# Altium PCB v2attemptBlinky(1).PcbDoc
Units mm, origin at the board's own origin, x right, y up, seen from the top; angles counter-clockwise.
Board outline 52.43 x 52.43 mm, 2 copper layers (F.Cu, B.Cu); 6 components, 4 nets, 14 pads, 0 vias.
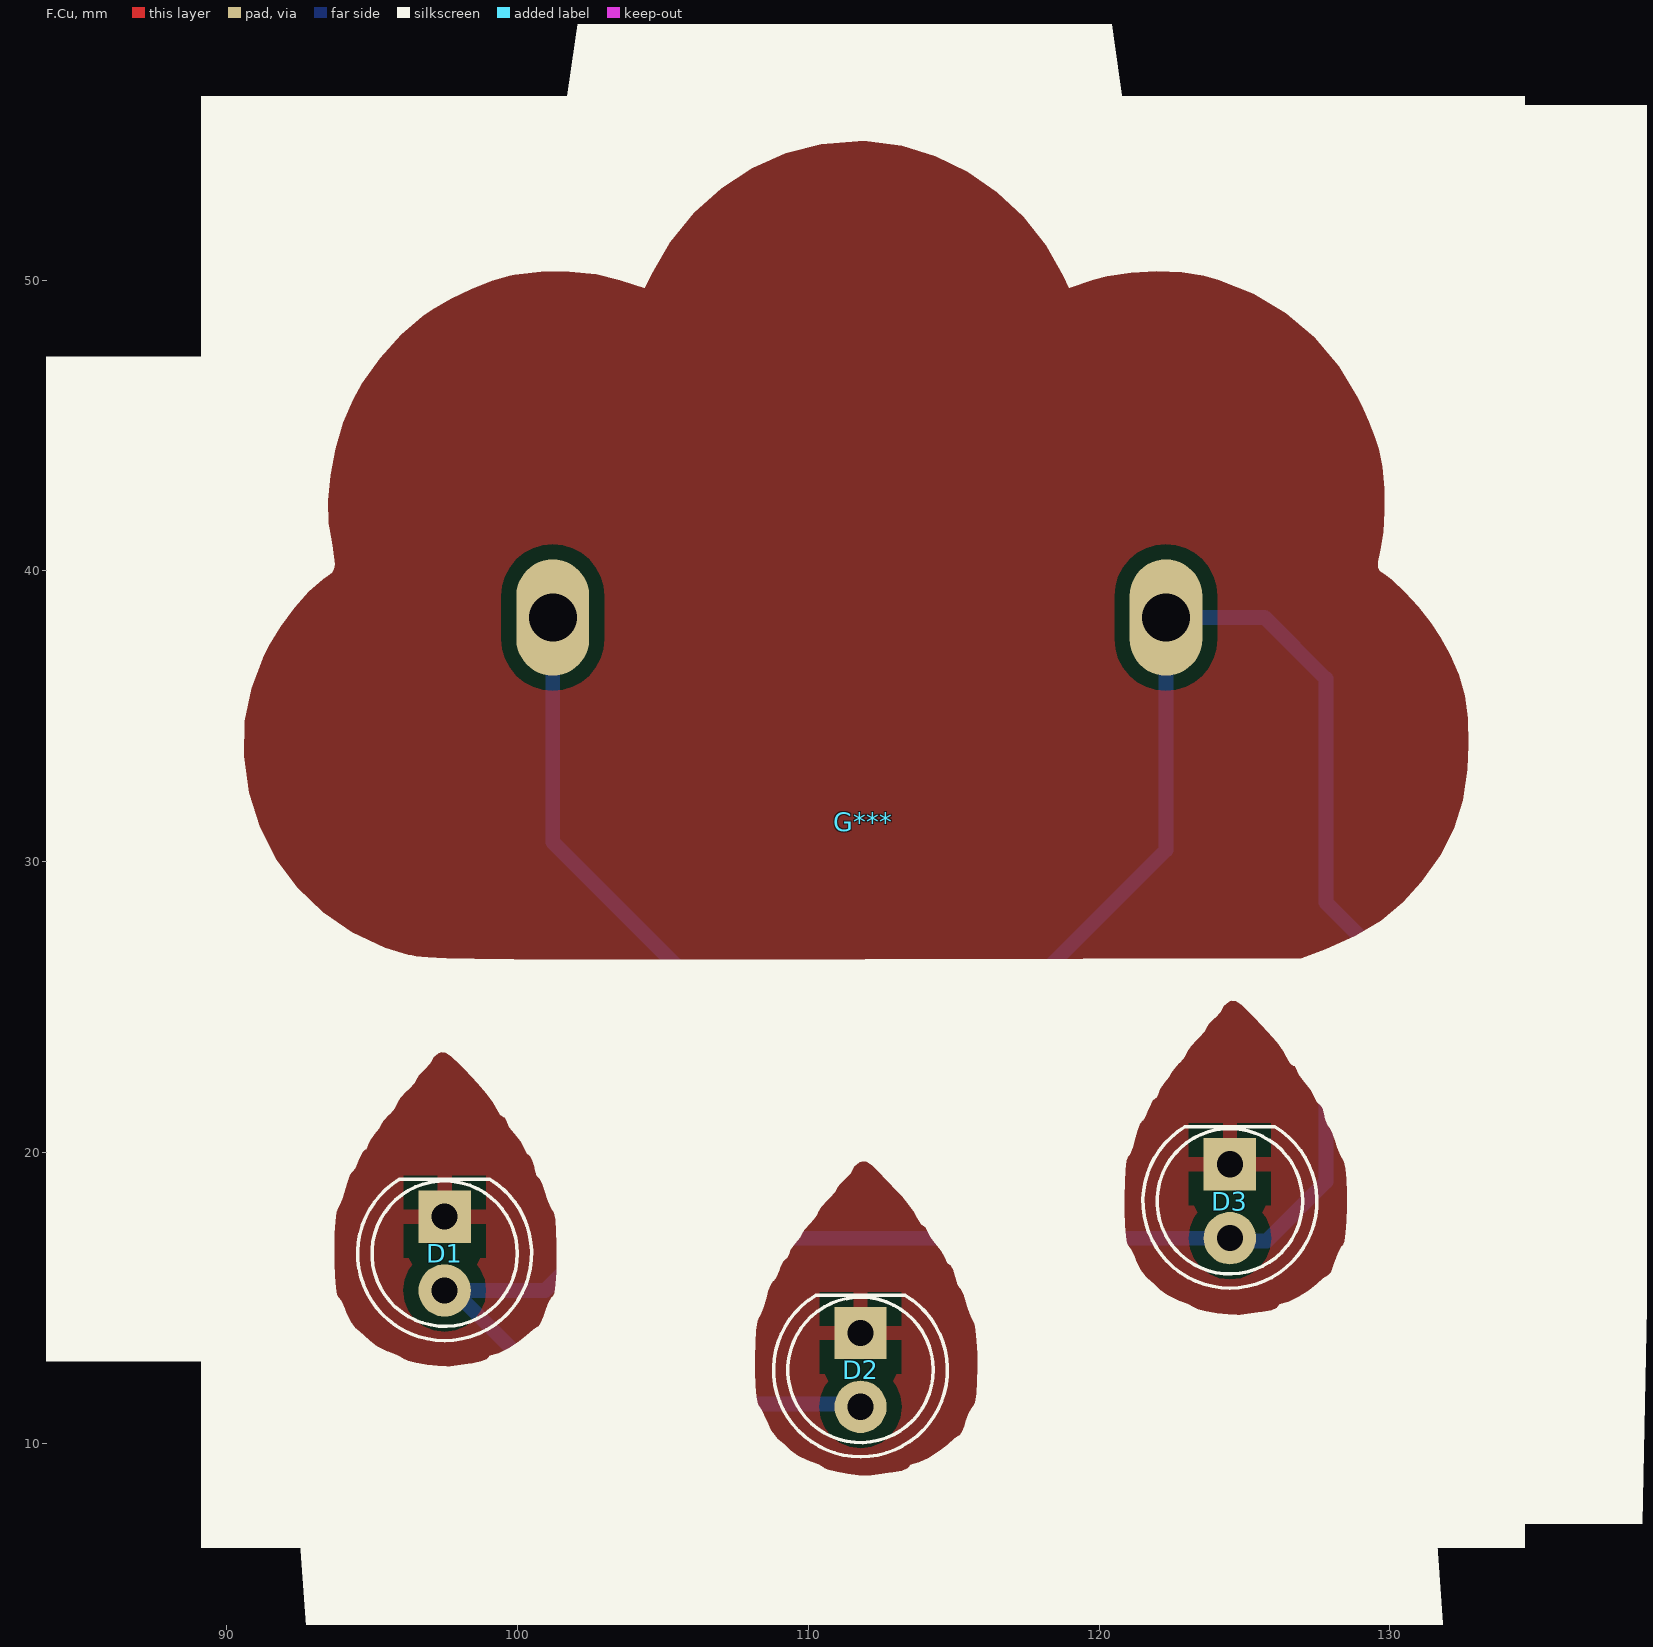
[diagram p0: F.Cu view]
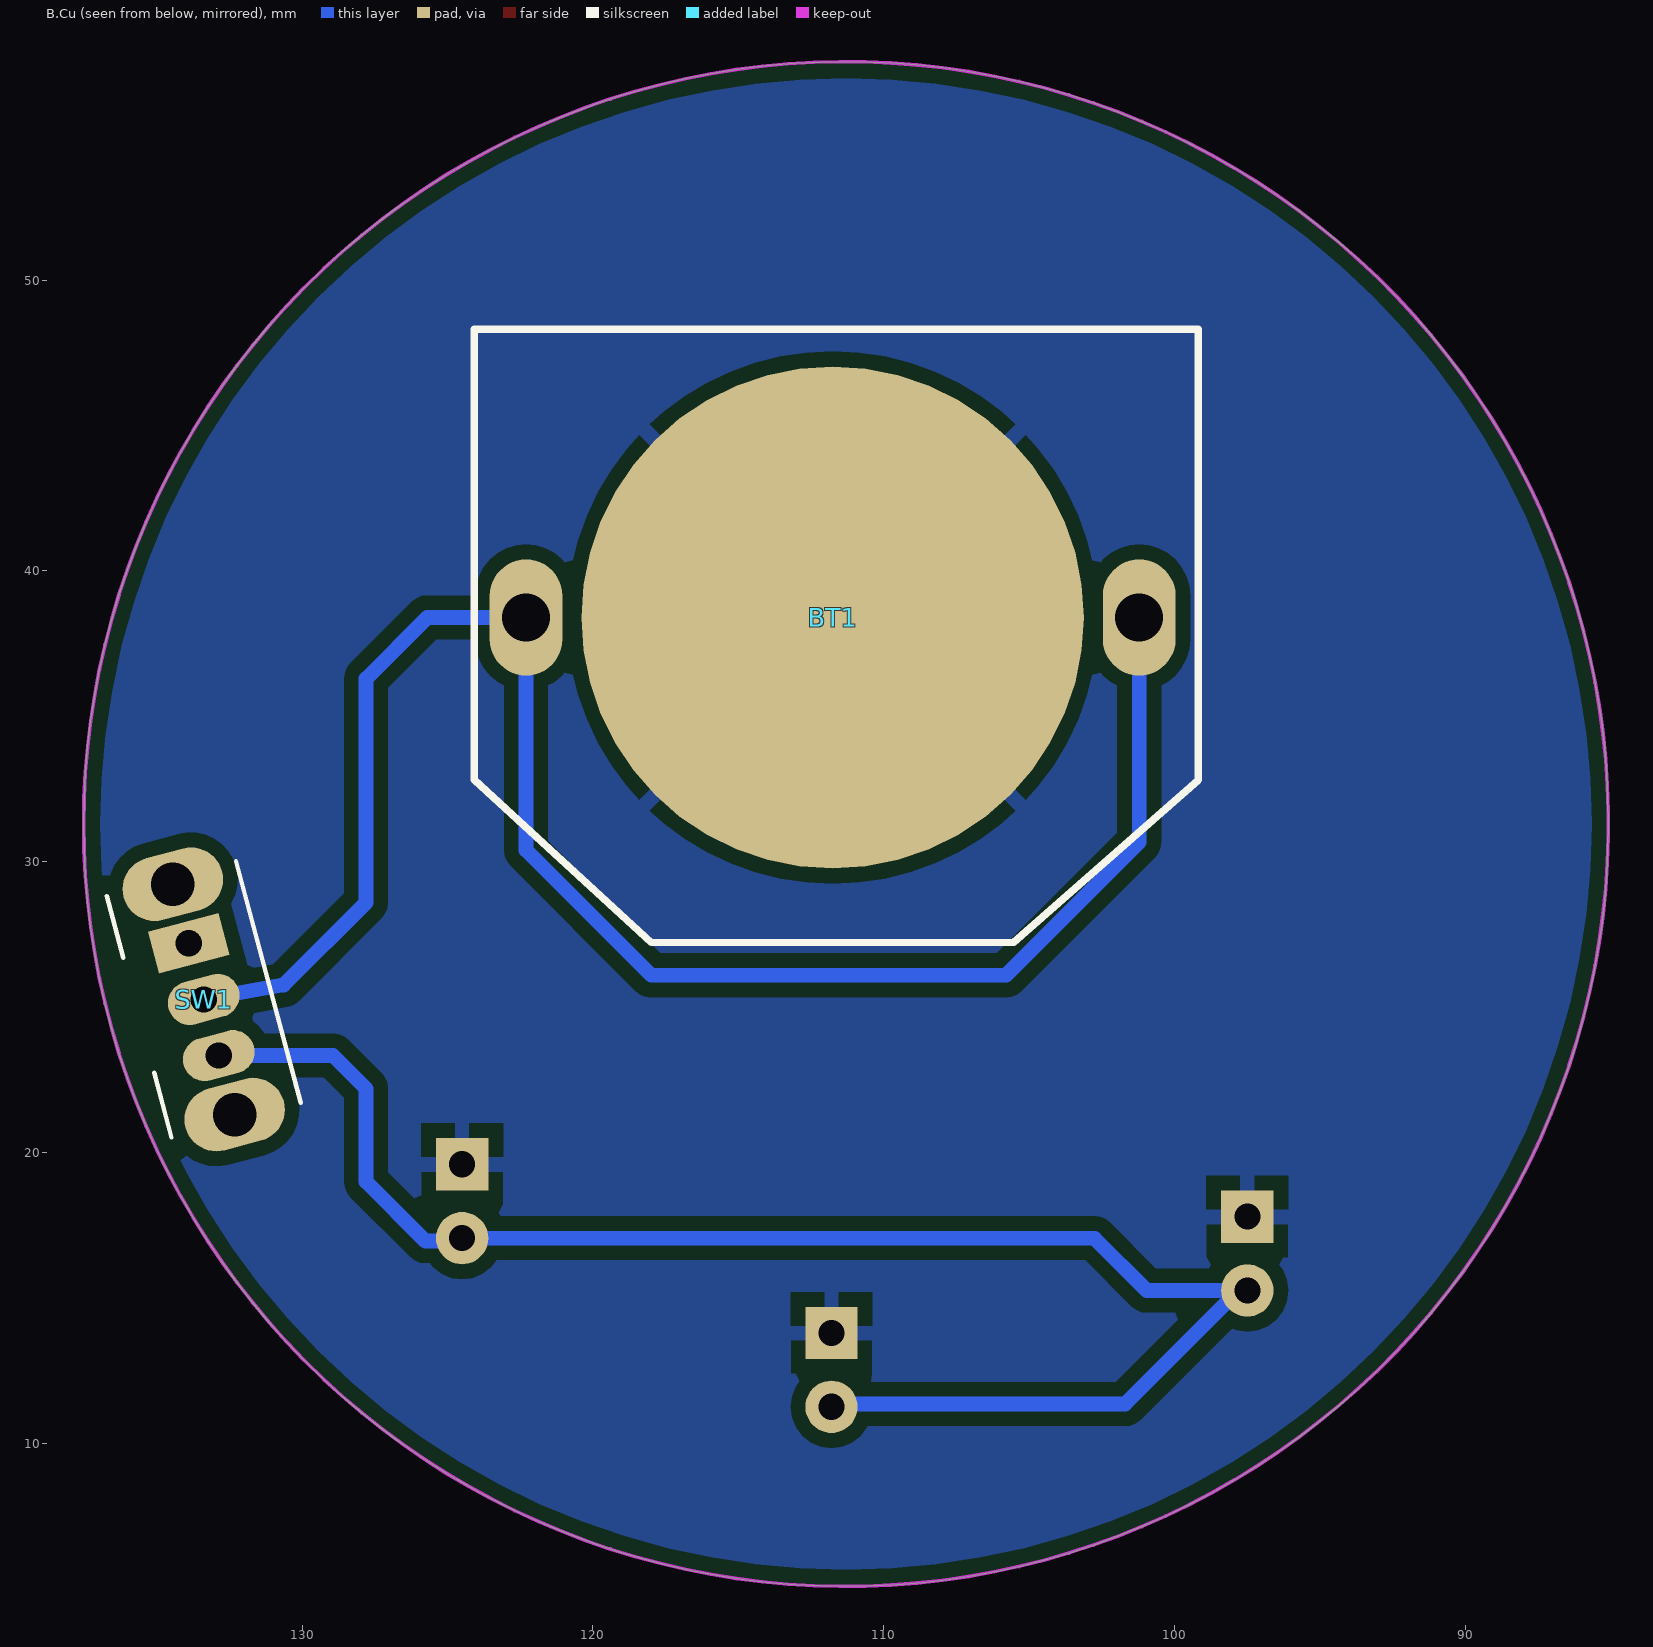
[diagram p1: B.Cu view, seen from below]

## Layer stack, top to bottom
F.Mask: solder mask 0.0102, Solder Resist, Dk 3.5
F.Cu: signal copper 0.0356
Dielectric 1: dielectric 0.32, FR-4, Dk 4.8
B.Cu: signal copper 0.0356
B.Mask: solder mask 0.0102, Solder Resist, Dk 3.5

## Board outline
137.513,31.3 ccw(c111.3,31.3) 111.3,57.513 ccw(c111.3,31.3) 85.087,31.3 ccw(c111.3,31.3) 111.3,5.087 ccw(c111.3,31.3)

## Design rules (kind name [scope] priority, off if disabled: settings)
BoardOutlineClearance [All] p1: gap=0.254 ignorepadtopadclearanceinfootprint=FALSE except(0: Arc-SplitContinuation Track-SplitContinuation SMDPad-SplitContinuation THPad-SplitContinuation Via-SplitContinuation Fill-SplitContinuation Poly-SplitContinuation Region-SplitContinuation Text-SplitContinuation)
Clearance "Clearence 0.508_Polygon" [InNamedPolygon('B.Cu-GND') OR InNamedPolygon('F.Cu-GND')] p1: gap=0.508 ignorepadtopadclearanceinfootprint=FALSE
Clearance "Clearence 0.2_NetClass" [InNetClass('Default')] p2: gap=0.2 ignorepadtopadclearanceinfootprint=FALSE
HoleSize "Hole Size (Default)" [All] p1: absolutevalues=TRUE maxlimit=10 minlimit=0.3 maxpercent=80.000 minpercent=20.000
MinimumSolderMaskSliver [All] p1: minsoldermaskwidth=0
PolygonConnect Polygon_F.Cu-GND_ConnectDirect [IsNamedPolygon('F.Cu-GND') vs IsVia] p1: connectstyle=Direct reliefconductorwidth=0.254 reliefentries=4 polygonreliefangle="90 Angle" airgapwidth=0.254
PolygonConnect Polygon_F.Cu-GND_ConnectRelief45 [IsNamedPolygon('F.Cu-GND') vs (IsThruPin or IsSMTPin) and (PadShape_AllLayers = 'Round')] p2: connectstyle=Relief reliefconductorwidth=0.508 reliefentries=4 polygonreliefangle="45 Angle" airgapwidth=0.508
PolygonConnect Polygon_F.Cu-GND_ConnectRelief90 [IsNamedPolygon('F.Cu-GND') vs (IsThruPin or IsSMTPin) and (PadShape_AllLayers <> 'Round')] p3: connectstyle=Relief reliefconductorwidth=0.508 reliefentries=4 polygonreliefangle="90 Angle" airgapwidth=0.508
PolygonConnect Polygon_B.Cu-GND_ConnectDirect [IsNamedPolygon('B.Cu-GND') vs IsVia] p4: connectstyle=Direct reliefconductorwidth=0.254 reliefentries=4 polygonreliefangle="90 Angle" airgapwidth=0.254
PolygonConnect Polygon_B.Cu-GND_ConnectRelief45 [IsNamedPolygon('B.Cu-GND') vs (IsThruPin or IsSMTPin) and (PadShape_AllLayers = 'Round')] p5: connectstyle=Relief reliefconductorwidth=0.508 reliefentries=4 polygonreliefangle="45 Angle" airgapwidth=0.508
PolygonConnect Polygon_B.Cu-GND_ConnectRelief90 [IsNamedPolygon('B.Cu-GND') vs (IsThruPin or IsSMTPin) and (PadShape_AllLayers <> 'Round')] p6: connectstyle=Relief reliefconductorwidth=0.508 reliefentries=4 polygonreliefangle="90 Angle" airgapwidth=0.508
RoutingVias [All] p1: holewidth=0.711 width=1.27 viastyle="Through Hole" minholewidth=0.711 minwidth=1.27 maxholewidth=0.711 maxwidth=1.27
SilkToSilkClearance [All] p1: silktosilkclearance=0
SilkToSolderMaskClearance [IsPad] p1: minsilkscreentomaskgap=0 clearancetoexposedcopper=TRUE
SolderMaskExpansion [All] p1: expansion=0.102 istentingtop=FALSE
Width [All] p1: maxlimit=10 minlimit=0.254 preferedwidth=0.254 minimp=50.000000 maximp=50.000000 favimp=50.000000
26 further rules are at their usual default settings.

## Classes and differential pairs
net class Default: GND LED+ Net-(SW1-Pad1) VCC

## Components (designator, comment, footprint, x,y, rotation, side; value= is the part's Value field where it differs from the comment)
BT1 "Battery_Cell" BatteryHolder_MPD_BK888_2032_THRU 122.3,38.4 r0 bottom
D1 "LED" LED_D5.0mm 97.5,17.8 r270 top
D2 "LED" LED_D5.0mm 111.8,13.8 r270 top
D3 "LED" LED_D5.0mm 124.5,19.6 r270 top
G*** "LOGO" NEGATIVE 111.887,31.37 r0 top
SW1 "SW_SPDT" SW_CuK_OS102011MA1QN1_SPDT_Angled 133.9,27.2 r75 bottom

## Footprints (in the part's own frame and the unit in brackets; to place one, negate y for a bottom-side part, rotate by r counter-clockwise, add the part's x,y. Pads: shape width x height; smd on the part's side, far side on the other; paste and mask are expansions set on the pad)
BatteryHolder_MPD_BK888_2032_THRU [mm]
  rrect100% 2.5x4 hole 1.65 paste-4 mask+0.05: 1(-21.082,0) 1(0,0)
  round 17.272 smd mask+0.05: 2(-10.541,0)
  silkscreen extent -23.11,-9.91 1.78,11.18
LED_D5.0mm [mm]
  rect 1.8x1.8 hole 0.9 paste-1.8 mask+0.05: 1(0,0)
  round 1.8 hole 0.9 paste-1.8 mask+0.05: 2(2.54,0)
  silkscreen extent -1.29,-2.99 4.26,2.99
NEGATIVE [mm]
  silkscreen extent -22.75,-24.96 22.75,24.96
SW_CuK_OS102011MA1QN1_SPDT_Angled [mm]
  rect 1.5x2.5 hole 0.9 paste-2.5 mask+0.05: 1(0,0)
  rrect100% 1.5x2.5 hole 0.9 paste-2.5 mask+0.05: 2(-2,0) 3(-4,0)
  rrect100% 2.2x3.5 hole 1.5 paste-3.5 mask+0.05: Un1(-6.1,0) Un2(2.1,0)
  silkscreen extent -6.3,-2.3 2.3,2.3

## Part data
BT1: library part BatteryHolder_MPD_BK888_2032_THRU
D1 D2 D3: library part LED_D5.0mm, "LED, diameter 5.0mm, 2 pins, http://cdn-reichelt.de/documents/datenblatt/A500/LL-504BC2E-009.pdf"
G***: library part NEGATIVE
SW1: library part SW_CuK_OS102011MA1QN1_SPDT_Angled, "CuK miniature slide switch, OS series, SPDT, right angle, http://www.ckswitches.com/media/1428/os.pdf"

## Nets (pads, with @x,y where several pads share a name; then routed paths per layer and width w, separated by ;. In a path a pad name is that pad's centre, name@x,y a point inside that pad or via, vN(x,y) a via of type N, cw(c..) or ccw(c..) an arc to the next point about the centre after c; other vN are vias at no path point)
GND: BT1.2 D1.1 D2.1 D3.1
LED+: D1.2 D2.2 D3.2 SW1.3 | length 58.7
  B.Cu w0.508: D1.2@97.6,15.46 101.7,11.36 D2.2@112,11.36 ; 99.46,15.26 D1.2 100.96,15.26 102.76,17.06 D3.2 ; D3.2@124.46,16.96 124.5,16.96 125.76,16.96 127.8,19 127.8,22.2 128.936,23.336 SW1.3
Net-(SW1-Pad1): SW1.1
VCC: BT1.1 SW1.2 | length 61.3
  B.Cu w0.508: BT1.1@101.218,38.4 101.218,30.682 105.8,26.1 118,26.1 122.3,30.4 122.3,38.4 125.7,38.4 127.8,36.3 127.8,28.6 130.633,25.767 SW1.2
pads on no net: SW1.Un1 SW1.Un2

## Polygon pours and split planes (outlines as drawn)
GND on B.Cu "B.Cu-GND" (solid, remove dead copper, pour order 0): 142.7,0.3 81.1,0.2 81.2,58 141.2,58.3
GND on F.Cu "F.Cu-GND" (solid, remove dead copper, pour order 1): 142.8,0.2 81.3,0 81,57.7 140.6,57.9

## Keep-outs
F.Cu:
  circle w0.127: c111.3,31.3 r26.213
Edge.Cuts:
  circle w0.127: c111.3,31.3 r26.213

## Silkscreen, mask and mechanical layers (free items; w line width, h text height)
F.SilkS:
  region: 138.684,7.24 133.604,7.24 134.112,56.008 139.7,56.008
  region: 131.572,7.24 132.08,0.128 92.964,0.636 92.456,7.748
  region: 89.408,12.828 83.312,12.828 82.804,47.372 89.408,47.372
  region: 120.904,55.5 101.6,55.5 102.108,59.056 120.396,59.056
F.Mask:
  circle w1.016: c100.7,37.905 r4.205
  circle w1.016: c121.7,37.905 r4.205
  region: 114.4,30.8 113.9,30.1 113.1,29.7 112.3,29.5 111.3,29.7 110.7,30 110,30.8 109.7,31.5 109.7,32.2 114.9,32.2
  lines w0.635: 109.6,32.2 ccw(c112.2,32.2) 114.8,32.2 109.6,32.2
Eco1.User:
  circle w15: c111.3,31.3 r33.1